# Altium PCB NP_aktivni_standard_Sallen_Key.PcbDoc
Units mil, origin at the board's own origin, x right, y up, seen from the top; angles counter-clockwise.
Board outline 984.25 x 787.4 mil, 2 copper layers (Top Layer, Bottom Layer); 15 components, 12 nets, 38 pads, 0 vias.
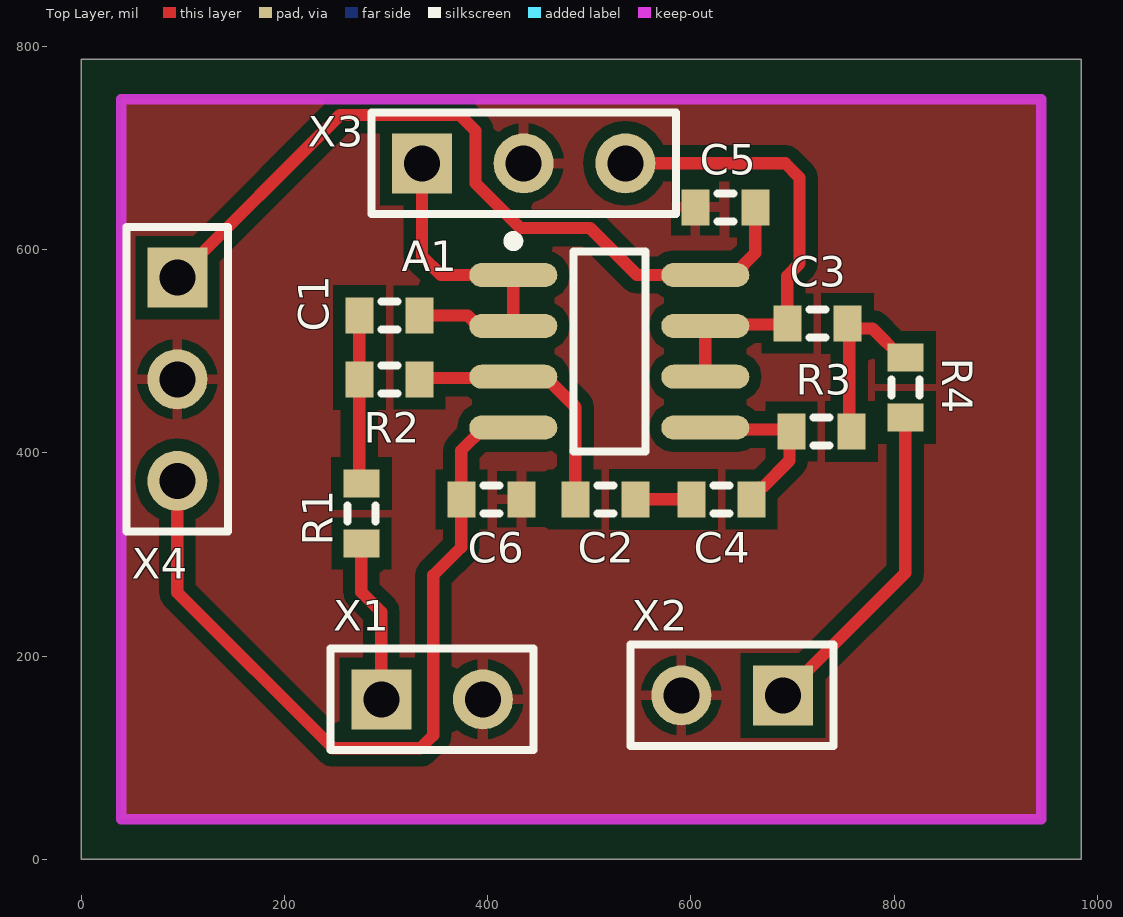
[diagram p0: Top Layer view]
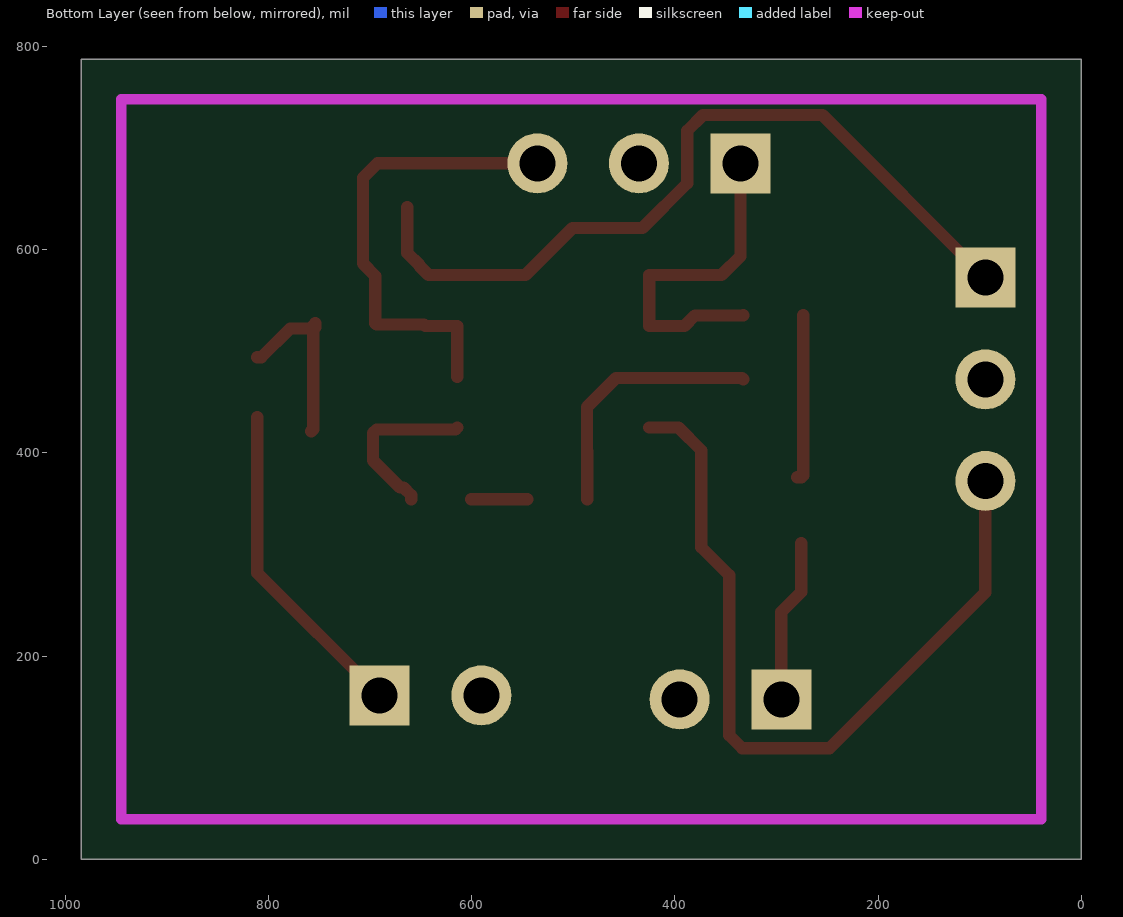
[diagram p1: Bottom Layer view, seen from below]

## Layer stack, top to bottom
Top Solder: solder mask 0.4, Solder Resist, Dk 3.5
Top Layer: signal copper 1.4
Dielectric 1: dielectric 12.6, FR-4, Dk 4.8
Bottom Layer: signal copper 1.4
Bottom Solder: solder mask 0.4, Solder Resist, Dk 3.5

## Board outline
0,0 984.25,0 984.25,787.4 0,787.4

## Design rules (kind name [scope] priority, off if disabled: settings)
Clearance [All] p1: gap=12 ignorepadtopadclearanceinfootprint=FALSE
MinimumSolderMaskSliver [All] p1 off: minsoldermaskwidth=10
PolygonConnect [All] p1: connectstyle=Relief reliefconductorwidth=10 reliefentries=4 polygonreliefangle="90 Angle" airgapwidth=10
RoutingVias [All] p1: holewidth=28 width=50 viastyle="Through Hole" minholewidth=28 minwidth=50 maxholewidth=28 maxwidth=50
SilkToSilkClearance [All] p1 off: silktosilkclearance=10
SilkToSolderMaskClearance [IsPad] p1 off: minsilkscreentomaskgap=10 clearancetoexposedcopper=TRUE
SolderMaskExpansion [All] p1: expansion=4 istentingtop=FALSE
Width [All] p1: maxlimit=12 minlimit=10 preferedwidth=12 toplayer_minwidth=12 bottomlayer_prefwidth=10 minimp=50.000000 maximp=50.000000 favimp=50.000000
27 further rules are at their usual default settings.

## Components (designator, comment, footprint, x,y, rotation, side; value= is the part's Value field where it differs from the comment)
A1 "TL072ACDT" ADI-R-8_N 519.68,500 r0 top
C1 "Cap" J1-0603 303.15,535.43 r0 top value=100pF
C2 "Cap" J1-0603 515.75,354.33 r180 top value=100pF
C3 "Cap" J1-0603 724.41,527.56 r180 top value=100pF
C4 "Cap" J1-0603 629.92,354.33 r180 top value=100pF
C5 "100n" J1-0603 633.86,641.73 r0 top value=100pF
C6 "100n" J1-0603 403.54,354.33 r180 top value=100pF
R1 "Res2" J1-0603 275.59,340.55 r90 top value=1K
R2 "Res2" J1-0603 303.15,472.44 r0 top value=1K
R3 "Res2" J1-0603 728.35,421.26 r0 top value=1K
R4 "Res2" J1-0603 811.02,464.57 r270 top value=1K
X1 "Ulaz_1" HDR1X2 295.28,157.48 r0 top
X2 "Ulaz_2" HDR1X2 690.55,161.42 r180 top
X3 "Izlaz" HDR1X3 335.43,685.04 r0 top
X4 "Napajanje" HDR1X3 94.49,572.44 r270 top

## Footprints (in the part's own frame and the unit in brackets; to place one, negate y for a bottom-side part, rotate by r counter-clockwise, add the part's x,y. Pads: shape width x height; smd on the part's side, far side on the other; paste and mask are expansions set on the pad)
ADI-R-8_N [mm] "SOIC, 8-Leads, Body 4.9x3.9mm, Pitch 1.27mm, IPC Medium Density"
  oval 2.2x0.6 smd: 1(-2.4,1.905) 2(-2.4,0.635) 3(-2.4,-0.635) 4(-2.4,-1.905) 5(2.4,-1.905) 6(2.4,-0.635) 7(2.4,0.635) 8(2.4,1.905)
  silkscreen extent -2.52,-2.5 0.9,2.88, body extent -2,-2.5 2,2.5, height 1.75
HDR1X2 [mm] "Connector; Header; 2 Position"
  rect 1.5x1.5 hole 0.9: 1(0,0)
  round 1.5 hole 0.9: 2(2.54,0)
  silkscreen extent -1.27,-1.27 3.81,1.27
HDR1X3 [mm] "Connector; Header; 3 Position"
  rect 1.5x1.5 hole 0.9: 1(0,0)
  round 1.5 hole 0.9: 2(2.54,0) 3(5.08,0)
  silkscreen extent -1.27,-1.27 6.35,1.27
J1-0603 [mm] "Chip Resistor, Body 1.6x0.8mm, IPC High Density"
  rect 0.7x0.9 smd: 1(-0.75,0) 2(0.75,0)
  silkscreen extent -0.2,-0.35 0.2,0.35, body extent -0.85,-0.48 0.85,0.48, height 0.9

## Part data
A1: "Dual opamp"
C1 C2 C3 C4: "Capacitor", LatestRevisionDate=17-Jul-2002, LatestRevisionNote="Re-released for DXP Platform.", PackageDescription="Radial Cap, Thru-Hole; 2 Leads; 0.3 in Pin Spacing", PackageReference=RAD-0.3, Published=8-Jun-2000, Publisher="Altium Limited"
C5 C6: library part Cap, "Capacitor", LatestRevisionDate=17-Jul-2002, LatestRevisionNote="Re-released for DXP Platform.", PackageDescription="Radial Cap, Thru-Hole; 2 Leads; 0.3 in Pin Spacing", PackageReference=RAD-0.3, Published=8-Jun-2000, Publisher="Altium Limited"
R1 R2 R3 R4: "Resistor", LatestRevisionDate=17-Jul-2002, LatestRevisionNote="Re-released for DXP Platform.", PackageDescription="Axial Device, Thru-Hole; 2 Leads; 0.4 in Pin Spacing", PackageReference=AXIAL-0.4, Published=8-Jun-2000, Publisher="Altium Limited"
X1 X2: library part "Header 2", "Header, 2-Pin", LatestRevisionDate=17-Jul-2002, LatestRevisionNote="Re-released for DXP Platform.", Publisher="Altium Limited"
X3 X4: library part "Header 3", "Header, 3-Pin", LatestRevisionDate=17-Jul-2002, LatestRevisionNote="Re-released for DXP Platform.", Publisher="Altium Limited"

## Nets (pads, with @x,y where several pads share a name; then routed paths per layer and width w, separated by ;. In a path a pad name is that pad's centre, name@x,y a point inside that pad or via, vN(x,y) a via of type N, cw(c..) or ccw(c..) an arc to the next point about the centre after c; other vN are vias at no path point)
GND: C5.1 C6.1 X1.2 X2.2 X3.2 X4.2
NetA1_1: A1.1 A1.2 C1.2 X3.1 | length 335.7
  Top Layer w12: C1.2 332.92,535.19 380.37,535.19 390.56,525 A1.2 A1.1 354.08,575 335.43,593.64 X3.1
NetA1_3: A1.3 C2.2 R2.2 | length 257.2
  Top Layer w12: R2.2 333.96,473.72 457.97,473.72 486.5,445.19 486.5,401.84 486.22,401.56 C2.2
NetA1_5: A1.5 C4.1 R3.1 | length 168
  Top Layer w12: A1.5 616.04,423.13 693.53,423.13 697.11,419.55 697.11,392.57 670.59,366.05 667.23,366.05 659.45,358.27 C4.1
NetA1_6: A1.6 A1.7 C3.2 X3.3 | length 457.5
  Top Layer w12: X3.3 692.78,685.04 706.98,670.84 706.98,586.31 694.88,574.21 C3.2 693.6,526.28 646.95,526.28 645.67,525 A1.7 A1.6
NetC1_1: C1.1 R1.2 R2.1 | length 164.3
  Top Layer w12: C1.1 R2.1 273.62,377.86 275.5,375.98 R1.2@279.53,375.98
NetC2_1: C2.1 C4.2 | length 55.1
  Top Layer w12: C2.1 C4.2
NetC3_1: C3.1 R3.2 R4.1 | length 178.9
  Top Layer w12: R3.2 755.91,423.23 755.91,521.65 753.94,523.62 C3.1 759,522.49 778.69,522.49 807.09,494.09 R4.1
NetR1_1: R1.1 X1.1 | length 161.7
  Top Layer w12: R1.1 275.59,263.22 295.28,243.53 X1.1
NetR4_2: R4.2 X2.1 | length 323.5
  Top Layer w12: X2.1 811.02,281.89 R4.2
VCC: A1.8 C5.2 X4.1 | length 785.3
  Top Layer w12: X4.1 254.61,732.57 372.42,732.57 387.91,717.08 387.91,665.35 431.97,621.29 500.76,621.29 547.05,575 642.52,575 651.48,583.96 651.48,584.88 663.39,596.78 C5.2
VSS: A1.4 C6.2 X4.3 | length 783
  Top Layer w12: X4.3 94.49,262.71 247.96,109.24 333.65,109.24 346.46,122.05 346.46,279.53 374.02,307.09 C6.2 374.02,402.53 396.49,425 A1.4

## Polygon pours and split planes (outlines as drawn)
GND on Top Layer "GND_POUR" (solid, remove dead copper, pour order 0): 39.37,39.37 944.88,39.37 944.88,748.03 39.37,748.03

## Keep-outs
Keep-Out Layer:
  lines w10: 39.37,39.37 39.37,748.03 944.88,748.03 944.88,39.37 39.37,39.37

## Silkscreen, mask and mechanical layers (free items; w line width, h text height)
Mechanical 1:
  the board outline again, w10

## Dimensions
984.25,0 to 984.25,787.4 on Mechanical 2
0,0 to 984.25,0 on Mechanical 2